# Altium PCB PCB.PcbDoc
Units mm, origin at the board's own origin, x right, y up, seen from the top; angles counter-clockwise.
Board outline 27.94 x 25.4 mm, 2 copper layers (Top Layer, Bottom Layer); 18 components, 23 nets, 81 pads, 18 vias.
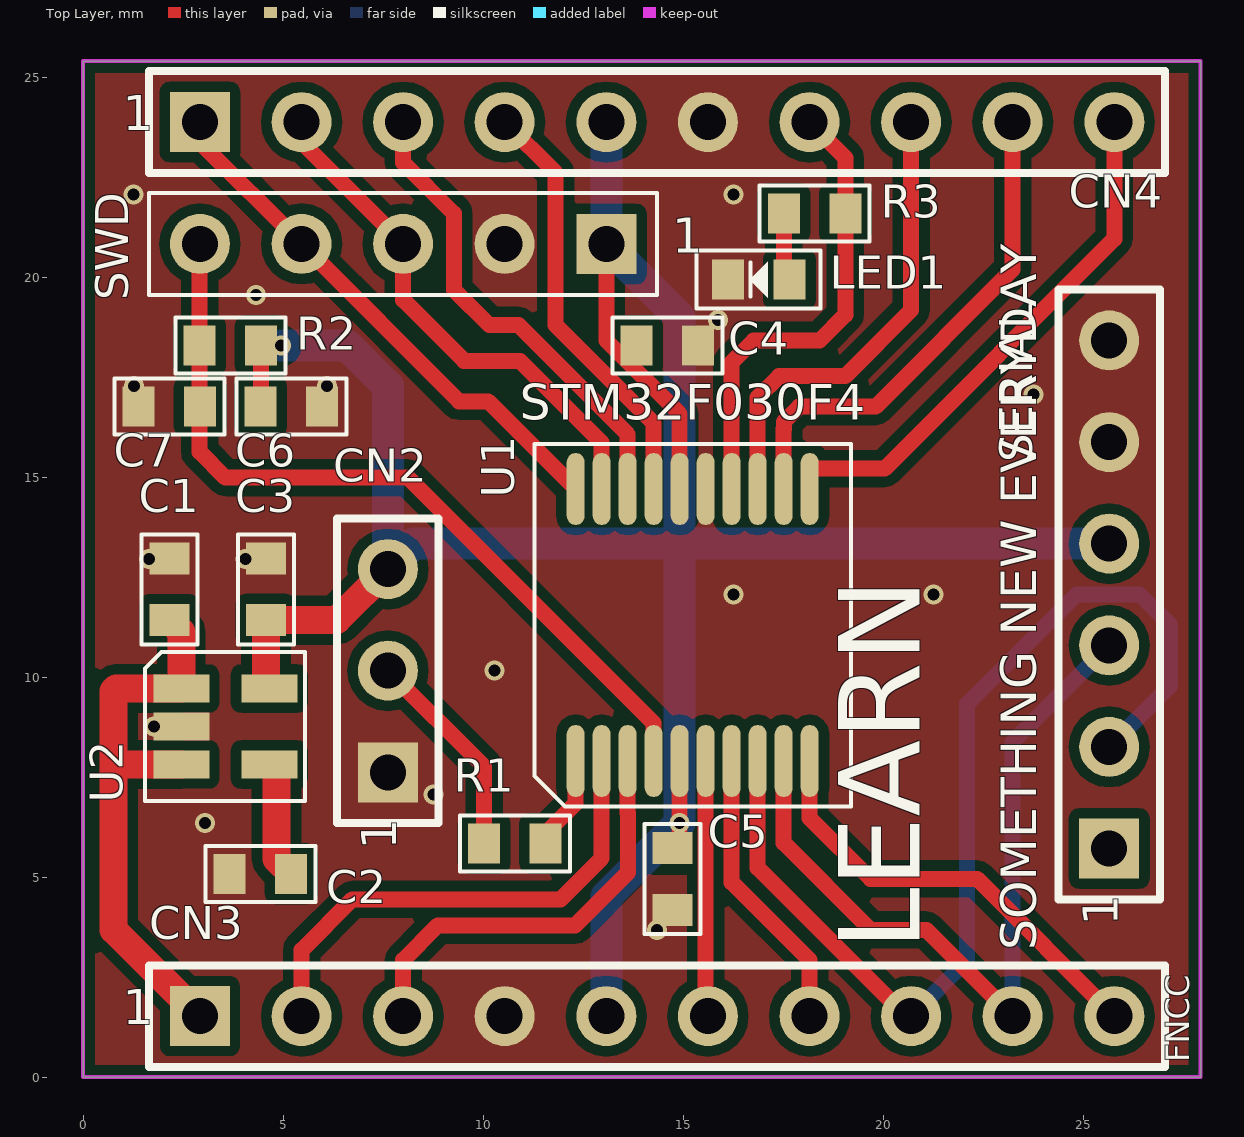
[diagram p0: Top Layer view]
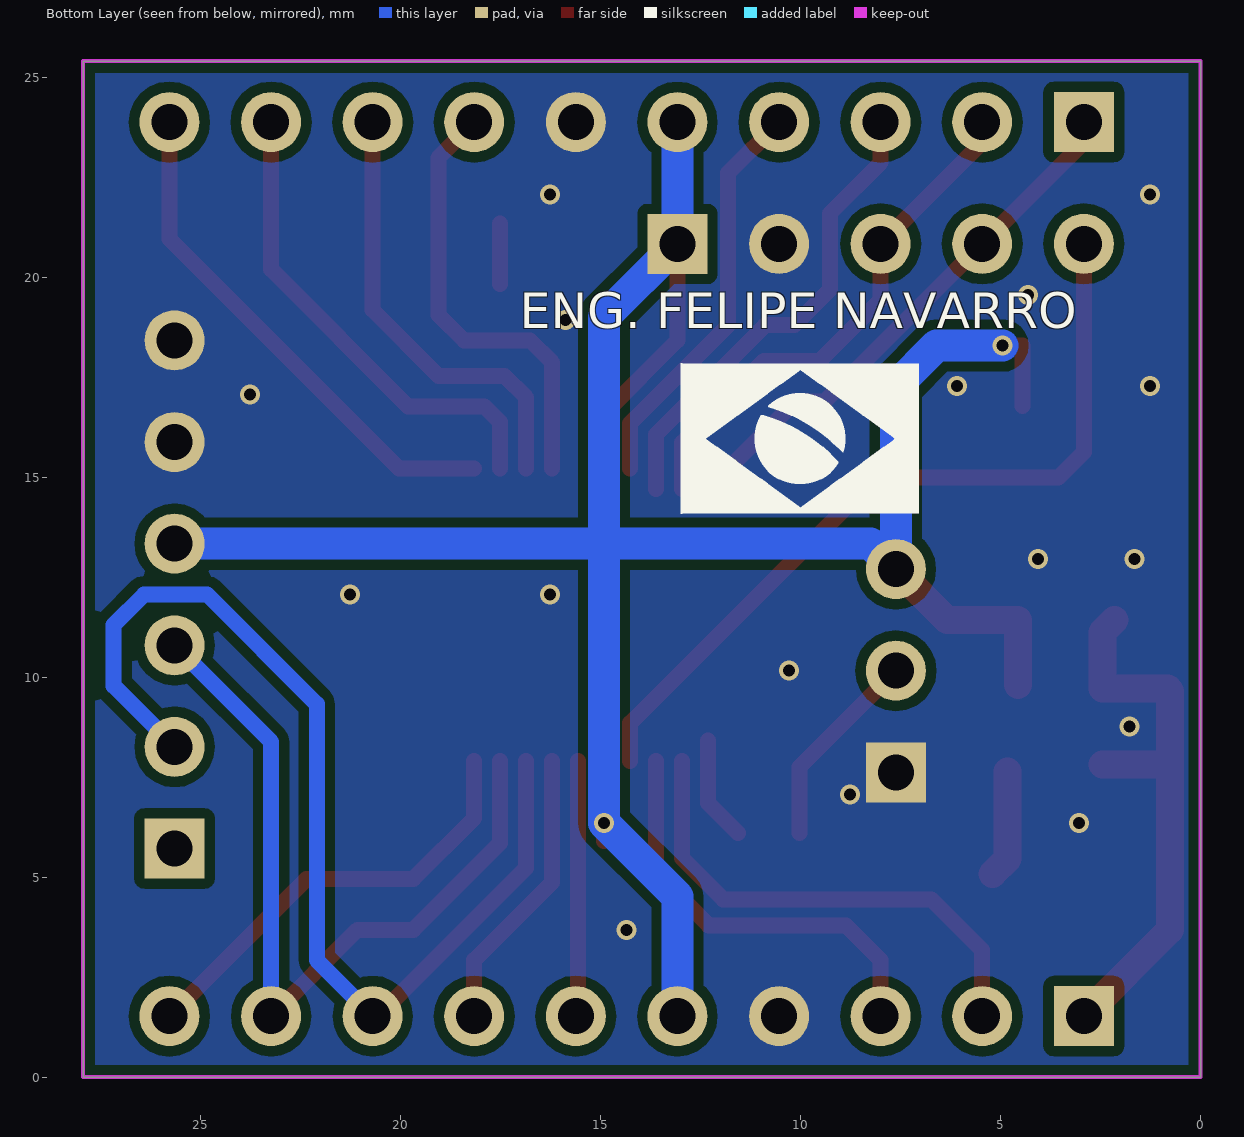
[diagram p1: Bottom Layer view, seen from below]

## Layer stack, top to bottom
Top Solder: solder mask 0.0102, Solder Resist, Dk 3.5
Top Layer: signal copper 0.0356
Dielectric 1: dielectric 0.32, FR-4, Dk 4.8
Bottom Layer: signal copper 0.0356
Bottom Solder: solder mask 0.0102, Solder Resist, Dk 3.5

## Board outline
0,0 27.94,0 27.94,25.4 0,25.4

## Design rules (kind name [scope] priority, off if disabled: settings)
Clearance [All] p1: gap=0.254 ignorepadtopadclearanceinfootprint=FALSE except(0: Arc-Hole Track-Hole SMDPad-Hole THPad-Hole Via-Hole Fill-Hole Poly-Hole Region-Hole Text-Hole)
PolygonConnect [All] p1: connectstyle=Direct reliefconductorwidth=0.254 reliefentries=4 polygonreliefangle="90 Angle" airgapwidth=0.254
RoomDefinition STM32F030P4-DevBoard [InComponentClass('STM32F030P4-DevBoard')] p1: confinementstyle=ConfineIn formatcopy=TRUE lockcomponents=FALSE outline -38.735,-27.94 12.065,-27.94 12.065,-2.54 -38.735,-2.54
RoutingVias [All] p1: holewidth=0.711 width=1.27 viastyle="Through Hole" minholewidth=0.711 minwidth=1.27 maxholewidth=0.711 maxwidth=1.27
SolderMaskExpansion [All] p1: expansion=0.102
Width [All] p1: maxlimit=10 minlimit=0.254 preferedwidth=0.254
30 further rules are at their usual default settings.

## Components (designator, comment, footprint, x,y, rotation, side; value= is the part's Value field where it differs from the comment)
C1 "Capacitor Cerâmico" CC0603 2.159,12.192 r270 top value=100nF
C2 "Capacitor Cerâmico" CC0603 4.434,5.083 r0 top value=10nF
C3 "Capacitor Cerâmico" CC0603 4.572,12.192 r270 top value=100nF
C4 "Capacitor Cerâmico" CC0603 14.605,18.288 r180 top value=100nF
C5 "Capacitor Cerâmico" CC0603 14.732,4.953 r90 top value=100nF
C6 "Capacitor Cerâmico" CC0603 5.207,16.764 r180 top value=100nF
C7 "Capacitor Cerâmico" CC0603 2.159,16.764 r0 top value=100nF
CN2 "Header 3" "CONN HDR1X3" 7.62,7.62 r90 top value="Barra de 40 pinos - ATENÇÃO"
CN3 "Header 10" "CONN HDR1X10" 2.921,1.524 r0 top value="Barra de 40 pinos - ATENÇÃO"
CN4 "Header 10" "CONN HDR1X10" 2.921,23.876 r0 top value="Barra de 40 pinos - ATENÇÃO"
LED1 "LED" "LED 0603" 16.891,19.939 r180 top value=VD
R1 "Resistor" CC0603 10.795,5.842 r180 top value=10K
R2 "Resistor" CC0603 3.683,18.288 r180 top value=10K
R3 "Resistor" CC0603 18.288,21.59 r0 top value=1K
SERIAL "Header 6" "CONN HDR1X6" 25.654,5.715 r90 top value="Barra de 40 pinos - ATENÇÃO"
SWD "Header 5" "CONN HDR1X5" 13.081,20.828 r180 top value="Barra de 40 pinos - ATENÇÃO"
U1 "STM32F030F4P6" TSSOP-20N 15.24,11.303 r90 top value="32 bits"
U2 "TPS79333DBVR" SOT-23-5N 3.556,8.763 r0 top

## Footprints (in the part's own frame and the unit in brackets; to place one, negate y for a bottom-side part, rotate by r counter-clockwise, add the part's x,y. Pads: shape width x height; smd on the part's side, far side on the other; paste and mask are expansions set on the pad)
CC0603 [mm] "Chip Resistor, 2-Leads, Body 1,6x0,8mm, IPC Medium Density"
  rect 0.8x1 smd: 1(-0.77,0) 2(0.77,0)
  silkscreen extent -1.38,-0.7 1.38,0.7, body extent -0.8,-0.42 0.8,0.43, height 0.45
"CONN HDR1X3" [mm] "Connector; Header; 3 Position"
  rect 1.5x1.5 hole 0.9: 1(0,0)
  round 1.5 hole 0.9: 2(2.54,0) 3(5.08,0)
  silkscreen extent -1.27,-1.27 6.35,1.27, body extent -1.27,-1.27 6.35,1.27, height 8.49
"CONN HDR1X5" [mm] "Connector; Header; 5 Position, Pitch 2.54mm"
  rect 1.5x1.5 hole 0.9: 1(0,0)
  round 1.5 hole 0.9: 2(2.54,0) 3(5.08,0) 4(7.62,0) 5(10.16,0)
  silkscreen extent -1.27,-1.27 11.43,1.27
"CONN HDR1X6" [mm] "Connector; Header; 6 Position"
  rect 1.5x1.5 hole 0.9: 1(0,0)
  round 1.5 hole 0.9: 2(2.54,0) 3(5.08,0) 4(7.62,0) 5(10.16,0) 6(12.7,0)
  silkscreen extent -1.27,-1.27 13.97,1.27
"CONN HDR1X10" [mm] "Connector; Header; 10 Position"
  rect 1.5x1.5 hole 0.9: 1(0,0)
  round 1.5 hole 0.9: 2(2.54,0) 3(5.08,0) 4(7.62,0) 5(10.16,0) 6(12.7,0) 7(15.24,0) 8(17.78,0) 9(20.32,0) 10(22.86,0)
  silkscreen extent -1.27,-1.27 24.13,1.27
"LED 0603" [mm] "Chip Diode, 2-Leads, Body 1,6x0,8mm, IPC Medium Density"
  rect 0.8x1 smd: 1(-0.77,0) 2(0.77,0)
  silkscreen extent -1.55,-0.73 1.55,0.73, body extent -0.82,-0.43 0.82,0.43, height 0.8
SOT-23-5N [mm] "SOT23, 5-Leads, Body 3,1x2,7mm (max), Pitch 0,95mm, IPC Medium Density"
  rect 1.4x0.7 smd: 1(-1.1,0.95) 2(-1.1,0) 3(-1.1,-0.95) 4(1.1,-0.95) 5(1.1,0.95)
  silkscreen extent -2.01,-1.86 2,1.86, body extent -1.4,-1.45 1.4,1.45, height 1.09
TSSOP-20N [mm] "TSOP, 20-Leads, Body 7,5x5,6mm (max), Pitch 0,65mm, IPC High Density"
  oval 1.8x0.45 smd: 1(-3.4,2.925) 2(-3.4,2.275) 3(-3.4,1.625) 4(-3.4,0.975) 5(-3.4,0.325) 6(-3.4,-0.325) 7(-3.4,-0.975) 8(-3.4,-1.625) 9(-3.4,-2.275) 10(-3.4,-2.925) 11(3.4,-2.925) 12(3.4,-2.275) 13(3.4,-1.625) 14(3.4,-0.975) 15(3.4,-0.325) 16(3.4,0.325) 17(3.4,0.975) 18(3.4,1.625) 19(3.4,2.275) 20(3.4,2.925)
  silkscreen extent -4.54,-3.96 4.52,3.95, body extent -3.95,-3.25 3.95,3.25, height 1.88

## Part data
C1 C3 C4 C5 C6 C7: library part "Cap 100nF 50V 0603 X7R", "Capacitor (Semiconductor SIM Model)", Supplier Part Number 1=1276-1000-1-ND, Tolerância=±10%, ComponentLink1Description=Datasheet, ComponentLink1URL=D:\Tecnoclade\Datasheet\!DataMissing.pdf, Corrente=*A, Obs=X7R, Potência=*W, Supplier 1=Digi-Key, Tensão=50V
  C1 C3 C4 C5: ChinesePrice=0,00250, Chinês=Local
  C6 C7: ChinesePrice=0,00000, Chinês=-----
C2: library part "Cap 10nF 50V 0603 X7R 5%", "Capacitor (Semiconductor SIM Model)", Supplier Part Number 1=399-1092-1-ND, Tolerância=±5%, ChinesePrice=0,00320, Chinês=Local, ComponentLink1Description=Datasheet, ComponentLink1URL=D:\Tecnoclade\Datasheet\!DataMissing.pdf, Corrente=*A, Obs=X7R, Potência=*W, Supplier 1=Digi-Key, Tensão=50V
CN2: "Header, 3-Pin", Supplier Part Number 1=A26509-40-ND, ChinesePrice=0,10000, Chinês="Proved - Local", ComponentLink1Description=Datasheet, ComponentLink1URL=D:\Tecnoclade\Datasheet\!DataMissing.pdf, Supplier 1=Digi-Key
CN3 CN4: "Header, 10-Pin", Supplier Part Number 1=A26509-40-ND, ChinesePrice=0,10000, Chinês="Proved - Local", ComponentLink1Description=Datasheet, ComponentLink1URL=D:\Tecnoclade\Datasheet\!DataMissing.pdf, Supplier 1=Digi-Key
LED1: library part "LED 0603 VD 2V 75mW", Supplier Part Number 1=160-1478-1-ND, ChinesePrice=0,02810, Chinês=Local, ComponentLink1Description=Datasheet, ComponentLink1URL=D:\Tecnoclade\Datasheet\!DataMissing.pdf, Corrente=20mA, Obs=35mcd@130º, Potência=75mW, Supplier 1=Digi-Key, Tensão=2V
R1 R2: library part "Res 10K 1% 0603 1/10W", Supplier Part Number 1=P10.0KHCT-ND, Tolerância=±1%, ChinesePrice=0,00089, Chinês=Local, ComponentLink1Description=Datasheet, ComponentLink1URL=D:\Tecnoclade\Datasheet\!DataMissing.pdf, Corrente=*A, Potência=1/10W, Supplier 1=Digi-Key, Tensão=*V
R3: library part "Res 1K 1% 0603 1/10W", Supplier Part Number 1=RMCF0603FT1K00CT-ND, Tolerância=±1%, ChinesePrice=0,00089, Chinês=Local, ComponentLink1Description=Datasheet, ComponentLink1URL=D:\Tecnoclade\Datasheet\!DataMissing.pdf, Corrente=*A, Potência=1/10W, Supplier 1=Digi-Key, Tensão=*V
SERIAL: "Header, 6-Pin", Supplier Part Number 1=A26509-40-ND, ChinesePrice=0,10000, Chinês="Proved - Local", ComponentLink1Description=Datasheet, ComponentLink1URL=D:\Tecnoclade\Datasheet\!DataMissing.pdf, Supplier 1=Digi-Key
SWD: "Header, 5-Pin", Supplier Part Number 1=A26509-40-ND, ChinesePrice=0,10000, Chinês="Proved - Local", ComponentLink1Description=Datasheet, ComponentLink1URL=D:\Tecnoclade\Datasheet\!DataMissing.pdf, Supplier 1=Digi-Key
U1: "Microcontrolador STM32F030F4P6", Supplier Part Number 1=497-14044-5-ND, ChinesePrice=0,00000, Chinês=----, ComponentLink1Description=Datasheet, Supplier 1=Digi-Key, Tensão="1V8 ~ 3V6"
U2: library part TPS79333, "ULTRALOW-NOISE, HIGH PSRR, FAST RF 200mA LOW-DROPOUT LINEAR  REGULATORS I", Supplier Part Number 1=296-12961-1-ND, ChinesePrice=0,00000, Chinês=----, ComponentLink1Description=Datasheet, ComponentLink1URL=D:\Tecnoclade\Datasheet\, Corrente=200mA, Supplier 1=Digi-Key, Tensão=3V3

## Via types
v1: diameter 0.5, hole 0.3, Top Layer to Bottom Layer, tented both sides, 18 vias

## Nets (pads, with @x,y where several pads share a name; then routed paths per layer and width w, separated by ;. In a path a pad name is that pad's centre, name@x,y a point inside that pad or via, vN(x,y) a via of type N, cw(c..) or ccw(c..) an arc to the next point about the centre after c; other vN are vias at no path point)
3V3: C3.2 C4.2 C5.2 C6.2 CN2.3 CN3.5 CN4.5 R2.1 SERIAL.4 SWD.1 U1.5 U1.16 U2.5 | length 65.4
  Top Layer w0.4: C6.2@4.453,16.78 R2.1 v1(4.953,18.288) ; SWD.1 13.081,18.415 14.915,16.581 U1.16@14.915,15.211 ; C5.2@14.915,5.906 v1(14.915,6.35) U1.5
  Top Layer w0.7: U2.5@4.572,9.797 C3.2 6.342,11.422 CN2.3
  Bottom Layer w0.8: v1(4.953,18.288) 6.604,18.288 7.62,17.272 CN2.3 8.255,13.335 14.915,13.335 ; CN3.5 13.081,4.516 v1(14.915,6.35) 14.915,13.335 ; CN4.5 SWD.1 14.915,18.994 14.915,13.335 ; SERIAL.4 14.915,13.335
5V: C1.2 CN3.1 U2.1 U2.3 | length 14.1
  Top Layer w0.7: 0.762,9.652 0.762,3.683 CN3.1 ; 0.823,9.713 U2.1 2.456,11.125 C1.2 ; 0.828,7.813 U2.3
BOOT0: R1.1 U1.1 | length 2.6
  Top Layer w0.4: R1.1@11.565,6.096 12.315,6.846 U1.1@12.315,8.411
GND: C1.1 C2.1 C3.1 C4.1 C5.1 C6.1 C7.1 CN2.1 CN3.4 CN4.6 LED1.2 SERIAL.5 SERIAL.6 SWD.2 U1.15 U2.2
  other v1: 14.351,3.683 3.048,6.35 8.765,7.06 1.778,8.763 10.287,10.16 16.265,12.06 21.265,12.06 1.651,12.954 4.064,12.954 23.765,17.06 1.27,17.272 6.096,17.272 15.875,18.923 4.318,19.558 1.265,22.06 16.265,22.06
NetC2_2: C2.2 U2.4 | length 2.7
  Top Layer w0.7: U2.4@4.834,7.635 4.834,5.453 C2.2
NetCN2_2: CN2.2 R1.2 | length 5.1
  Top Layer w0.4: CN2.2 10.025,7.755 R1.2@10.025,6.096
NetLED1_1: LED1.1 R3.1 | length 1.5
  Top Layer w0.4: LED1.1@17.518,19.828 R3.1@17.518,21.336
PA0: CN3.6 U1.6 | length 6.3
  Top Layer w0.4: CN3.6@15.565,1.58 U1.6
PA1: CN3.7 U1.7 | length 7.2
  Top Layer w0.4: U1.7 16.215,4.867 18.161,2.921 CN3.7
PA2: CN3.8 SERIAL.2 U1.8 | length 26.5
  Top Layer w0.4: U1.8 16.865,5.233 CN3.8@20.574,1.524
  Bottom Layer w0.4: CN3.8 22.098,2.921 22.098,9.326 24.837,12.065 26.416,12.065 27.178,11.303 27.178,9.779 SERIAL.2
PA3: CN3.9 SERIAL.3 U1.9 | length 19.8
  Top Layer w0.4: U1.9 17.515,5.853 19.685,3.683 21.082,3.683 CN3.9
  Bottom Layer w0.4: CN3.9 23.241,8.382 SERIAL.3
PA4: CN3.10 U1.10 | length 11.1
  Top Layer w0.4: U1.10 18.165,6.473 19.685,4.953 22.352,4.953 CN3.10
PA5: CN4.10 U1.11 | length 12.9
  Top Layer w0.4: U1.11@18.165,15.211 20.037,15.211 25.781,20.955 CN4.10
PA6: CN4.9 U1.12 | length 12.2
  Top Layer w0.4: U1.12@17.515,15.211 17.515,16.196 ; 17.519,16.2 17.519,16.383 17.9,16.764 19.812,16.764 23.241,20.193 CN4.9
PA7: CN4.8 U1.13 | length 11.2
  Top Layer w0.4: U1.13@16.865,15.211 16.865,16.992 17.399,17.526 19.05,17.526 20.701,19.177 CN4.8
PA09: CN4.4 U1.17 | length 10.2
  Top Layer w0.4: CN4.4 11.811,22.606 11.811,18.796 14.265,16.342 U1.17@14.265,15.211
PA10: CN4.3 U1.18 | length 11.9
  Top Layer w0.4: CN4.3 8.001,22.86 9.271,21.59 9.271,19.685 10.16,18.796 10.886,18.796 13.615,16.067 U1.18
PB1: CN4.7 R3.2 U1.14 | length 11.2
  Top Layer w0.4: U1.14@16.215,15.211 16.215,17.866 16.764,18.415 18.415,18.415 19.058,19.058 19.058,21.336 19.058,22.979 CN4.7
PF0: CN3.2 U1.2 | length 12.5
  Top Layer w0.4: CN3.2 5.461,3.175 6.731,4.445 11.938,4.445 12.965,5.472 U1.2
PF1: CN3.3 U1.3 | length 10.7
  Top Layer w0.4: CN3.3 8.001,2.921 8.871,3.791 12.3,3.791 13.619,5.11 13.619,6.608 ; 13.615,6.608 U1.3
RST_ARM: C7.2 R2.2 SWD.5 U1.4 | length 20.3
  Top Layer w0.4: SWD.5@2.913,20.82 R2.2 2.913,15.629 3.556,14.986 8.128,14.986 14.265,8.849 U1.4
SWCLK: CN4.1 SWD.4 U1.20 | length 13.5
  Top Layer w0.4: CN4.1 2.921,23.368 SWD.4 9.398,16.891 10.127,16.891 U1.20
SWDIO: CN4.2 SWD.3 U1.19 | length 12.6
  Top Layer w0.4: CN4.2@5.461,23.368 SWD.3 8.001,19.431 9.525,17.907 10.922,17.907 12.965,15.864 U1.19
pads on no net: SERIAL.1

## Polygon pours and split planes (outlines as drawn)
GND on Top Layer "Top Layer-No Net 1" (solid, pour order 0): 0,25.4 27.94,25.4 27.94,0 0,0
GND on Bottom Layer "Top Layer-No Net 1" (solid, pour order 2): 0,25.4 27.94,25.4 27.94,0 0,0

## Keep-outs
Keep-Out Layer:
  the board outline again, w0.1

## Silkscreen, mask and mechanical layers (free items; w line width, h text height)
Top Overlay:
  text "STM32F030F4" at 10.922,16.129 h1.52
  text "LEARN" at 21.59,3.175 h3.5 r90
  text "SOMETHING NEW EVERYDAY" at 24.13,3.175 h1.52 r90
  text "FNCC" at 27.85,0.375 h1 r90
Bottom Overlay:
  drawing of 846 lines, arcs and shapes, not listed
  text "ENG. FELIPE NAVARRO" at 17.018,18.415 h1.52
BOARD OUTLINE:
  the board outline again, w0.1

## Text inside footprints (layer, text, board x,y; h text height)
CN2: Top Overlay "1" at 8.116,5.685 h1.5 r90
CN3: Top Overlay "1" at 0.986,1.028 h1.5
CN4: Top Overlay "1" at 0.986,23.38 h1.5
SERIAL: Top Overlay "1" at 26.15,3.78 h1.5 r90
SWD: Top Overlay "1" at 14.732,20.32 h1.5